# Altium PCB MainPCBV6.PcbDoc (part 3 of 5)
Units mm, origin at the board's own origin, x right, y up, seen from the top; angles counter-clockwise.
Board outline 176 x 144.01 mm, 2 copper layers (Top Layer, Bottom Layer); 232 components, 243 nets, 937 pads, 277 vias.
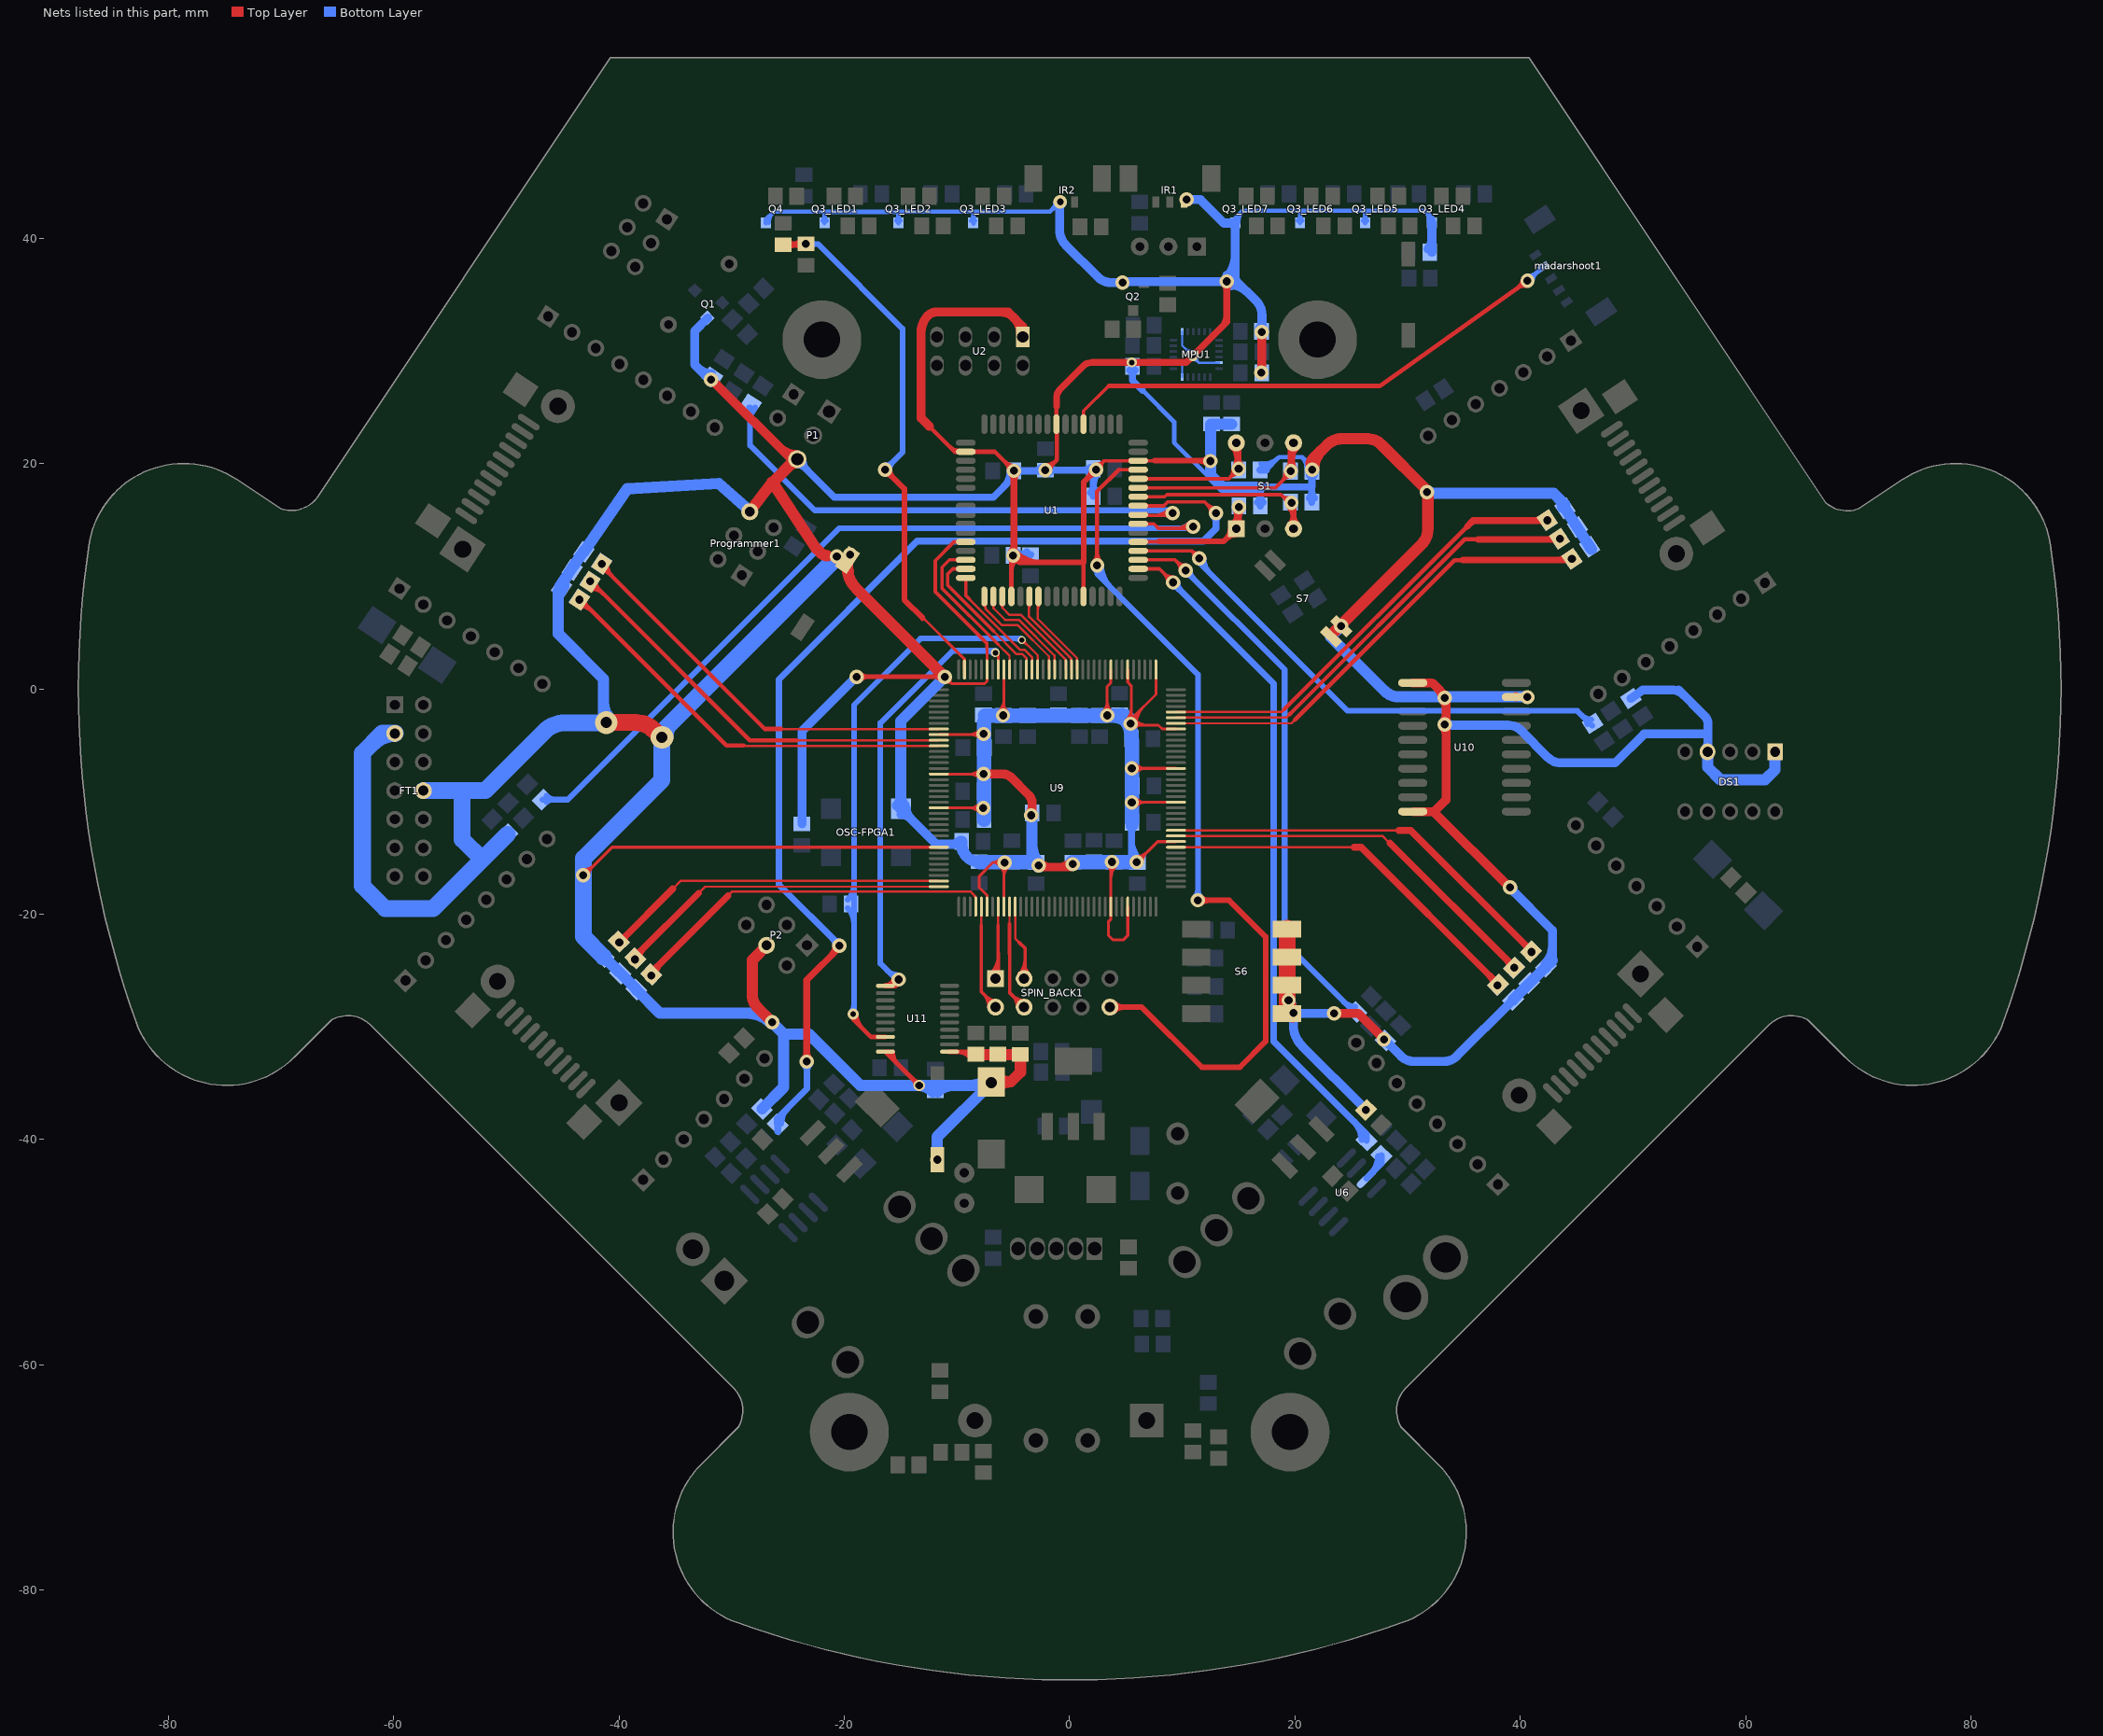
[diagram p3: the nets of this part, all layers, seen from the top]

## Via types
v1: diameter 1.27, hole 0.711, Top Layer to Bottom Layer, 228 vias
v2: diameter 1, hole 0.5, Top Layer to Bottom Layer, 16 vias
v3: diameter 2, hole 1, Top Layer to Bottom Layer, 11 vias
v4: diameter 0.8, hole 0.5, Top Layer to Bottom Layer, 5 vias
v5: diameter 1, hole 0.7, Top Layer to Bottom Layer, 5 vias
v6: diameter 1.2, hole 0.6, Top Layer to Bottom Layer, 3 vias
v7: diameter 1.778, hole 0.965, Top Layer to Bottom Layer, 2 vias
v8: diameter 1, hole 0.6, Top Layer to Bottom Layer, 2 vias
v9: diameter 0.9, hole 0.5, Top Layer to Bottom Layer, 1 vias
v10: diameter 0.7, hole 0.45, Top Layer to Bottom Layer, 1 vias
v11: diameter 1.2, hole 0.9, Top Layer to Bottom Layer, 1 vias
v12: diameter 0.8, hole 0.4, Top Layer to Bottom Layer, 1 vias
v13: diameter 1.1, hole 0.711, Top Layer to Bottom Layer, 1 vias

## Nets (pads, with @x,y where several pads share a name; then routed paths per layer and width w, separated by ;. In a path a pad name is that pad's centre, name@x,y a point inside that pad or via, vN(x,y) a via of type N, cw(c..) or ccw(c..) an arc to the next point about the centre after c; other vN are vias at no path point) (continued)
CUR_KICK_O: R5.1 U1.9 | length 107.3
  Top Layer w0.305: U1.9@6.075,16.25 8.35,16.25 8.684,16.583 11.992,16.583 v1(12.979,15.596) ; U1.9@6.762,16.163 cw(c6.971,15.954) 6.971,16.25 cw(c6.971,16.546) U1.9@6.762,16.336 ; v1@12.497,15.596 ccw(c11.332,15.596) 12.156,16.419 ccw(c12.979,17.243) v1@12.979,16.078
  Top Layer w0.6: v1@-23.579,-32.859 ccw(c-24.151,-32.287) -23.343,-32.287 ccw(c-22.534,-32.287) v1@-23.106,-32.859 ; v1(-23.343,-33.096) -23.343,-25.857 v1@-20.345,-22.86 ; -21.127,-23.641 ccw(c-21.959,-22.809) v1@-20.782,-22.809
  Bottom Layer w0.6: R5.1@-25.972,-38.595 -25.972,-38.164 -23.317,-35.509 v1@-23.317,-33.401 ; R5.1@-25.914,-39.313 R5.1@-25.914,-38.665 ; R5.1@-25.635,-38.595 cw(c-23.783,-38.595) -25.093,-37.285 ; v1@-23.579,-33.333 cw(c-24.213,-33.966) -23.317,-33.966 ; -23.317,-33.844 cw(c-22.595,-33.844) v1@-23.106,-33.333 ; -21.055,-22.151 cw(c-21.713,-22.809) v1@-20.782,-22.809 ; -20.932,-22.273 ccw(c-20.447,-21.788) v1@-20.447,-22.474 ; v1@-20.371,-22.835 -25.806,-17.399 -25.806,0.838 -13.538,13.106 11.862,13.106 12.979,14.224 v1(12.979,15.596) ; v1@12.743,15.359 cw(c12.171,14.787) 12.979,14.787 cw(c13.788,14.787) v1@13.216,15.359
  other v1: -20.447,-22.809
CUR_M1_O: R1.1 U1.8 | length 52.6
  Top Layer w0.305: U1.8@6.075,15.45 6.132,15.392 8.941,15.392 v1(9.144,15.596) ; U1.8@6.762,15.536 ccw(c7.109,15.884) 7.109,15.392 ; 7.488,15.392 ccw(c7.488,17.251) v1@8.803,15.937 ; 8.224,15.392 ccw(c8.224,16.515) v1@9.018,15.721 ; 8.469,15.392 cw(c8.469,14.921) v1@8.803,15.254
  Bottom Layer w0.508: R1.1@-28.467,24.991 R1.1@-28.372,24.895 ; -28.372,23.883 cw(c-26.85,23.883) R1.1@-27.926,24.96 ; R1.1@-28.372,24.968 -28.372,21.59 -22.631,15.85 8.89,15.85 v1@9.296,15.443 ; 7.611,15.85 cw(c7.611,14.063) v1@8.875,15.326
CUR_M2_O: R7.1 U1.7 | length 78.6
  Top Layer w0.305: U1.7@6.075,14.65 7.474,14.65 7.874,14.249 10.795,14.249 v1(10.947,14.402) ; U1.7@6.762,14.563 cw(c6.971,14.354) 6.971,14.65 cw(c6.971,14.946) U1.7@6.762,14.736 ; 9.414,14.249 ccw(c9.414,15.935) v1@10.606,14.743 ; v1@10.606,14.061 ccw(c10.15,13.605) 10.15,14.249 ccw(c10.15,15.199) v1@10.822,14.528
  Bottom Layer w0.508: R7.1@-46.801,-9.841 -44.563,-9.841 -20.472,14.249 10.744,14.249 10.897,14.402 v1(10.947,14.402) ; R7.1@-46.45,-10.05 cw(c-45.945,-10.556) R7.1@-45.945,-9.841 ; R7.1@-46.45,-9.49 ccw(c-45.603,-8.644) -45.603,-9.841 ; 9.66,14.249 ccw(c9.66,15.69) v1@10.678,14.671
CUR_M3_O: R3.1 U1.3 | length 54.9
  Top Layer w0.305: U1.3@6.075,11.45 9.353,11.45 v1@10.185,10.617 ; U1.3@6.762,11.363 cw(c6.971,11.154) 6.971,11.45 cw(c6.971,11.746) U1.3@6.762,11.536 ; v1@9.804,10.516 ccw(c8.639,10.516) 9.463,11.339 ccw(c10.287,12.163) v1@10.287,10.998
  Bottom Layer w0.508: v1@10.274,10.503 19.075,1.702 19.075,-22.527 R3.1@25.338,-28.79 ; v1@10.287,10.135 cw(c10.287,9.276) 10.894,9.883 ; v1@10.668,10.516 ccw(c11.649,10.516) 10.955,9.822 ; 24.346,-27.798 ccw(c25.369,-26.775) R3.1@25.369,-28.221
  other v1: 10.287,10.516
CUR_M4_O: R9.1 U1.4 | length 51.5
  Top Layer w0.305: U1.4@6.075,12.25 10.839,12.25 ; U1.4@6.762,12.163 cw(c6.971,11.954) 6.971,12.25 cw(c6.971,12.546) U1.4@6.762,12.336 ; v1@11.03,11.659 ccw(c10.357,11.768) 10.839,12.25 ; v1@11.429,12.059 cw(c11.321,12.731) 10.839,12.25 ; v1(11.506,11.582) 10.839,12.25
  Bottom Layer w0.508: v1@11.316,11.392 24.663,-1.956 45.06,-1.956 R9.1@46.38,-3.277 ; v1@11.887,11.582 ccw(c13.727,11.582) 12.426,10.282 ; 45.483,-2.38 ccw(c46.329,-1.534) R9.1@46.329,-2.73 ; 45.723,-2.62 cw(c45.217,-3.126) R9.1@45.933,-3.126
CUR_MAIN: R11.2 U6.7 | length 4.3
  Bottom Layer w0.6: U6.7@26.357,-43.456 27.675,-42.139 R11.2@27.675,-41.439 ; U6.7@26.753,-43.06 ccw(c25.202,-41.509) R11.2@27.395,-41.509
CUR_MAIN_O: R12.1 U1.2 | length 64.9
  Top Layer w0.305: U1.2@6.075,10.65 7.969,10.65 v1(9.169,9.449) ; U1.2@6.762,10.563 cw(c6.971,10.354) 6.971,10.65 cw(c6.971,10.946) U1.2@6.762,10.736 ; v1@8.687,9.449 ccw(c7.522,9.449) 8.346,10.273 ccw(c9.169,11.097) v1@9.169,9.931
  Bottom Layer w0.6: v1@9.119,9.449 v1(9.169,9.449) ; v1@9.169,9.114 cw(c9.169,8.428) 9.655,8.913 ; v1@9.504,9.449 ccw(c10.436,9.449) 9.777,8.79 ; 9.652,8.915 18.11,0.457 18.11,-31.293 26.354,-39.536 R12.1@26.354,-40.093 ; 25.292,-38.475 cw(c23.746,-40.022) R12.1@25.933,-40.022
CUR_MSP: SPIN_BACK1.10 U1.13 | length 89.3
  Top Layer w0.305: 4.362,19.45 U1.13@6.075,19.45 ; U1.13@5.389,19.363 ccw(c5.179,19.154) 5.179,19.45 ccw(c5.179,19.746) U1.13@5.389,19.536
  Top Layer w0.381: v1@2.124,11.262 ccw(c1.365,12.021) 2.438,12.021 ccw(c3.512,12.021) v1@2.753,11.262 ; v1(2.438,10.947) 2.438,17.526 4.362,19.45
  Top Layer w0.508: SPIN_BACK1.10@3.574,-28.261 6.391,-28.261 11.725,-33.594 15.123,-33.594 17.399,-31.318 17.399,-22.022 14.148,-18.771 v1(11.379,-18.771) ; SPIN_BACK1.10@3.925,-28.612 cw(c4.771,-29.458) 4.771,-28.261 cw(c4.771,-27.063) SPIN_BACK1.10@3.925,-27.91 ; v1@11.649,-19.04 cw(c12.299,-19.69) 12.299,-18.771 cw(c12.299,-17.851) v1@11.649,-18.501
  Bottom Layer w0.508: v1@2.217,10.637 cw(c1.911,10.208) 2.438,10.208 cw(c2.966,10.208) v1@2.66,10.637 ; v1@2.311,10.947 ccw(c3.791,10.947) 2.745,9.901 ; v1(2.438,10.947) 2.438,10.208 11.379,1.267 v1(11.379,-18.771) ; v1@2.819,10.947 ccw(c5.525,10.947) 3.612,9.034 ; v1@11.11,-18.501 ccw(c10.459,-17.851) 11.379,-17.851 ccw(c12.299,-17.851) v1@11.649,-18.501
D0: U1.46 U9.63 | length 14.4
  Top Layer w0.203: -6.366,3.953 -6.315,3.902 -6.313,3.902 -5.342,2.931 U9.63@-5.342,1.711
  Top Layer w0.305: U1.46@-9.911,11.363 ccw(c-10.121,11.154) -10.121,11.45 ccw(c-10.121,11.746) U1.46@-9.911,11.536 ; U1.46@-9.225,11.45 -10.674,11.45 -11.328,10.795 -11.328,8.915 -6.366,3.953
D1: U1.47 U9.60 | length 13.8
  Top Layer w0.2: -6.68,5.038 -4.715,3.073 -4.191,3.073 -3.842,2.725 U9.60@-3.842,1.711
  Top Layer w0.305: U1.47@-9.911,10.563 ccw(c-10.121,10.354) -10.121,10.65 ccw(c-10.121,10.946) U1.47@-9.911,10.736 ; U1.47@-9.225,10.65 -10.382,10.65 -10.82,10.211 -10.82,9.177 -6.756,5.112
D2: U1.48 U9.59 | length 11.3
  Top Layer w0.203: -8.905,7.976 -8.905,7.961 -4.419,3.475 -4.008,3.475 -3.342,2.809 U9.59@-3.342,1.711
  Top Layer w0.305: U1.48@-9.311,9.763 cw(c-9.521,9.554) -9.225,9.554 cw(c-8.929,9.554) U1.48@-9.138,9.763 ; U1.48@-9.225,9.85 -9.225,8.296 -8.905,7.976
D3: U1.49 U9.56 | length 10.1
  Top Layer w0.203: U1.49@-7.669,7.454 cw(c-7.879,7.13) -7.493,7.13 ; U1.49@-7.575,8.2 -7.493,8.118 -7.493,7.137 -5.994,5.639 -4.597,5.639 -1.842,2.884 U9.56@-1.842,1.711
D4: U1.50 U9.55 | length 10.1
  Top Layer w0.203: U1.50@-6.897,7.477 cw(c-7.193,7.181) -6.775,7.181 cw(c-6.356,7.181) U1.50@-6.652,7.477 ; U1.50@-6.775,8.2 -6.775,7.156 -5.74,6.121 -4.51,6.121 -1.342,2.954 U9.55@-1.342,1.711
D5: U1.51 U9.53 | length 10.3
  Top Layer w0.203: U1.51@-6.095,7.474 cw(c-6.362,7.194) -5.975,7.194 ; U1.51@-5.975,8.2 -5.975,7.194 ; U1.51@-5.855,7.474 ccw(c-5.587,7.194) -5.975,7.194 ; -0.455,2.691 cw(c-0.671,2.475) U9.53@-0.366,2.475 ; U9.53@-0.342,1.711 -0.342,2.578 -4.317,6.553 -5.334,6.553 -5.975,7.194
D6: U1.54 U9.52 | length 9.1
  Top Layer w0.203: U1.54@-3.697,7.477 cw(c-3.916,7.258) -3.607,7.258 ; -3.607,7.104 cw(c-3.079,7.104) U1.54@-3.452,7.477 ; U1.54@-3.575,8.2 -3.607,8.168 -3.607,6.413 0.158,2.649 U9.52@0.158,1.711 ; -0.005,2.811 cw(c-0.341,2.475) U9.52@0.134,2.475
D7: U1.55 U9.51 | length 8.5
  Top Layer w0.203: U1.55@-2.897,7.477 cw(c-3.086,7.289) -2.819,7.289 ; -2.819,7.073 cw(c-2.249,7.073) U1.55@-2.652,7.477 ; U1.55@-2.819,8.155 -2.819,6.196 0.658,2.719 U9.51@0.658,1.711
DCH_LIMIT: madarshoot1.4 U1.21 | length 50.4
  Top Layer w0.305: U1.21@1.139,24.186 ccw(c0.929,24.396) 1.225,24.396 ccw(c1.521,24.396) U1.21@1.312,24.186 ; U1.21@1.225,23.5 1.225,24.669 3.454,26.899
  Top Layer w0.4: 3.454,26.899 27.534,26.899 ; 27.537,26.894 v1(40.64,36.22) ; v1@40.211,36.293 cw(c39.175,36.467) 39.784,35.611 cw(c40.393,34.756) v1@40.568,35.791
  Bottom Layer w0.4: v1(40.64,36.22) madarshoot1.4@42.04,37.461 ; v1@40.666,36.655 ccw(c40.729,37.703) 41.426,36.917 ccw(c42.122,36.131) v1@41.074,36.194 ; 41.661,37.126 ccw(c41.439,37.376) madarshoot1.4@41.773,37.356
DIN: U9.65 U11.1 | length 44.8
  Top Layer w0.254: U9.65@-6.342,1.711 v4@-6.342,3.066
  Top Layer w0.508: U11.1@-15.714,-26.361 ccw(c-15.714,-25.698) v1@-15.065,-25.832 ; v1@-15.57,-25.811 cw(c-16.337,-25.819) U11.1@-15.795,-26.361 ; v1@-15.562,-25.73 cw(c-16.337,-25.57) -16.337,-26.361 U11.1@-15.795,-26.361 ; v1@-15.248,-26.183 ccw(c-15.346,-26.81) U11.1@-15.795,-26.361 ; v1@-15.215,-25.781 U11.1@-15.795,-26.361
  Bottom Layer w0.508: -16.186,-25.012 ccw(c-15.189,-24.015) v1@-15.189,-25.425 ; v1@-15.151,-26.048 -16.815,-24.384 -16.815,-3.048 -10.389,3.378 -6.579,3.378 -6.502,3.302 -6.502,3.2 v4(-6.604,3.2) ; v1@-15.151,-25.845 v1@-15.151,-25.692 ; -7.386,3.378 cw(c-7.386,2.419) v4@-6.707,3.097
  other v1: -15.189,-25.806
DONE: R52.1 R54.1 U9.71 | length 56.8
  Top Layer w0.254: -13.005,6.299 -9.342,2.637 U9.71@-9.342,1.711 ; -9.453,2.747 cw(c-9.725,2.475) U9.71@-9.34,2.475
  Top Layer w0.508: R52.1@-23.383,39.436 R52.1@-23.343,39.395 ; v1@-16.464,19.502 v1@-16.4,19.439 ; v1@-16.383,19.075 cw(c-16.383,18.156) -15.733,18.806 cw(c-15.082,19.456) v1@-16.002,19.456 ; v1(-16.383,19.456) -14.681,17.755 -14.681,17.719 -14.681,7.905 -13.04,6.264
  Top Layer w0.6: R54.1@-25.425,39.436 R52.1@-23.383,39.436 ; R54.1@-25.078,39.189 cw(c-24.48,38.591) -24.48,39.436 cw(c-24.48,40.281) R54.1@-25.078,39.683 ; -24.536,39.436 ccw(c-24.536,40.524) R52.1@-23.766,39.755 ; -24.399,39.436 ccw(c-24.399,40.488) R52.1@-23.656,39.744 ; -24.192,39.436 cw(c-24.192,38.834) R52.1@-23.766,39.26 ; R52.1@-24.056,39.436 cw(c-24.056,38.87) R52.1@-23.656,39.27
  Bottom Layer w0.508: v1(-23.419,39.507) -23.502,39.507 -23.538,39.472 -22.352,39.472 -22.327,39.446 -22.301,39.446 ; v1@-23.149,39.238 cw(c-22.585,38.673) -22.585,39.472 ; v1@-23.149,39.777 ccw(c-22.413,40.513) -22.413,39.472 ; -22.285,39.43 -14.834,31.979 -14.834,21.006 v1(-16.383,19.456) ; v1@-16.459,19.38 v1(-16.383,19.456) ; v1@-16.383,19.837 ccw(c-16.383,20.757) -15.733,20.107 ccw(c-15.082,19.456) v1@-16.002,19.456 ; v1@-16.256,19.355 -16.358,19.456 v1(-16.383,19.456)
GND: C1.1 C2.1 C3.1 C4.1 C5.1 C6.1 C8.1 C9.1 C10.1 C11.1 C12.1 C13.1 C40.2 C41.1 C42.1 C43.1 C44.2 C45.1 C46.1 C47.1 C48.1 C49.1 C50.1 C51.1 C52.1 C53.1 C54.1 C55.1 C56.1 C57.1 C58.1 C59.1 C60.1 C61.1 C62.1 C63.1 C64.1 C65.1 C66.1 C67.1 C68.1 C69.1 C70.1 DS1.1 DS1.4 FB1.1 FT1.3 FT1.8 IR1.3 IR2.1 MPU1.1 MPU1.11 MPU1.18 OSC-FPGA1.2 P1.3 P2.4 Programmer1.6 Q1.3 Q2.3 Q3_LED1.3 Q3_LED2.3 Q3_LED3.3 Q3_LED4.3 Q3_LED5.3 Q3_LED6.3 Q3_LED7.3 Q4.3 R18.1 R19.1 R20.1 R21.1 R22.2 R26_drivermotor1.1 R26_drivermotor2.1 R26_drivermotor3.1 R26_drivermotor4.1 R27_drivermotor1.1 R27_drivermotor2.1 R27_drivermotor3.1 R27_drivermotor4.1 R28_drivermotor1.1 R28_drivermotor2.1 R28_drivermotor3.1 R28_drivermotor4.1 R43.2 Reset1.1 Reset-FPGA.1 S6.1 S6.2 S6.3 S6.4 S7.1 S7.2 U1.14 U1.24 U1.34 U1.44 U1.52 U1.60 U2.1 U9.9 U9.16 U9.22 U9.29 U9.37 U9.42 U9.45 U9.64 U9.67 U9.81 U9.88 U9.94 U9.101 U9.114 U9.117 U9.136 U9.139 U10.1 U10.10 U10.19 U11.10 U11.11 | length 1151.9
  Top Layer w0.254: v1@-43.18,-16.307 ccw(c-43.18,-15.571) -42.66,-16.091 ; v1@-43.18,-16.053 ccw(c-43.18,-14.704) -42.226,-15.658 ; v1@-43.078,-16.51 -40.632,-14.064 U9.101@-11.617,-14.064 ; v1@-42.672,-16.561 cw(c-41.568,-16.561) -42.349,-15.78 ; U9.94@-11.617,-10.564 v1@-7.62,-10.564 ; U9.88@-11.617,-7.564 -7.702,-7.564 v1@-7.696,-7.569 ; U9.81@-11.617,-4.064 v1@-7.569,-4.064 ; v1@-11.1,1.067 -10.49,0.457 ; v1@-10.941,0.577 cw(c-10.818,0.129) -10.49,0.457 ; v1@-10.594,0.903 ccw(c-10.185,0.763) -10.49,0.457 ; -8.994,-4.064 ccw(c-8.994,-2.665) v1@-8.005,-3.654 ; -8.965,-10.564 cw(c-8.965,-11.886) v1@-8.03,-10.951 ; -8.885,-7.564 cw(c-8.885,-8.809) v1@-8.005,-7.928 ; -8.859,-7.564 ccw(c-8.859,-6.356) v1@-8.005,-7.21 ; -8.83,-10.564 ccw(c-8.83,-9.433) v1@-8.03,-10.233 ; -8.75,-4.064 cw(c-8.75,-5.117) v1@-8.005,-4.372 ; -8.381,-4.064 ccw(c-8.381,-3.278) v1@-7.825,-3.834 ; -8.352,-10.564 cw(c-8.352,-11.273) v1@-7.85,-10.771 ; U9.114@-7.342,-19.339 -7.342,-18.312 -8.052,-17.602 -8.052,-16.662 -6.807,-15.418 ; -7.342,3.607 U9.67@-7.342,1.711 -7.342,0.659 -7.544,0.457 -10.49,0.457 ; v1@-6.277,-2.003 ccw(c-7.328,-0.952) -5.842,-0.952 ; v1@-6.198,-15.723 ccw(c-6.807,-16.18) -6.807,-15.418 ; v1@-6.198,-15.113 cw(c-6.807,-14.656) -6.807,-15.418 ; v1@-6.15,-15.777 cw(c-6.894,-16.521) -5.842,-16.521 ; v1@-6.098,-2.183 ccw(c-6.715,-1.566) -5.842,-1.566 ; v1@-5.867,-15.418 -6.807,-15.418 ; v1@-5.867,-2.413 -5.842,-2.388 U9.64@-5.842,1.711 ; U9.117@-5.842,-19.339 v1@-5.842,-15.418 ; -5.842,-16.767 cw(c-4.442,-16.767) v1@-5.432,-15.777 ; -5.842,-16.154 cw(c-5.055,-16.154) v1@-5.612,-15.597 ; -5.842,-1.319 ccw(c-4.875,-1.319) v1@-5.559,-2.003 ; v1@2.921,-2.413 3.327,-2.007 3.327,0.203 3.658,0.534 U9.45@3.658,1.711 ; v1@2.968,-2.003 ccw(c2.101,-1.136) 3.327,-1.136 ccw(c4.554,-1.136) v1@3.687,-2.003 ; v1@3.4,-15.726 cw(c2.778,-16.349) 3.658,-16.349 ; 3.658,-16.838 cw(c5.23,-16.838) v1@4.118,-15.726 ; 3.658,-16.225 cw(c4.617,-16.225) v1@3.939,-15.547 ; v1@3.658,-15.341 U9.136@3.658,-19.339 3.658,-20.454 3.429,-20.683 3.429,-21.869 3.861,-22.301 4.75,-22.301 5.156,-21.895 5.156,-20.607 5.158,-20.605 U9.139@5.158,-19.339 ; v1@5.051,-2.74 ccw(c4.061,-1.75) 5.461,-1.75 ; U9.42@5.158,1.711 5.158,0.583 5.461,0.279 5.461,-3.226 7.874,-3.226 8.212,-3.564 U9.29@9.433,-3.564 ; v1@5.207,-3.175 5.639,-3.175 5.664,-3.15 5.664,-2.489 7.658,-0.496 U9.37@7.658,1.711 ; v1@5.231,-2.919 ccw(c4.674,-2.363) 5.461,-2.363 ; v1(5.41,-3.099) cw(c6.269,-3.099) 5.662,-2.492 ; v1@5.41,-2.591 ccw(c5.41,-2.223) 5.67,-2.483 ; v1@5.461,-10.058 5.466,-10.064 U9.16@9.433,-10.064 ; 5.461,-1.995 ccw(c6.514,-1.995) 5.769,-2.74 ccw(c6.943,-1.566) 6.943,-3.226 ; v1@5.486,-7.064 U9.22@9.433,-7.064 ; v1@5.59,-2.919 ccw(c6.33,-2.179) 6.33,-3.226 ccw(c6.33,-4.019) v1@5.769,-3.458 ; v1@5.664,-3.099 cw(c7.136,-3.099) 6.095,-2.058 ; v1@5.691,-10.263 cw(c6.173,-10.745) 6.173,-10.064 ; v1@5.871,-10.443 cw(c6.787,-11.359) 6.787,-10.064 ; v1@5.871,-9.725 ccw(c6.69,-8.906) 6.69,-10.064 ; v1@5.871,-7.42 cw(c6.732,-8.281) 6.732,-7.064 ; v1@5.871,-6.702 ccw(c6.745,-5.828) 6.745,-7.064 ; v1@5.918,-3.099 cw(c8.003,-3.099) 6.529,-1.625 ; v1@5.944,-15.138 ccw(c5.944,-14.464) 6.421,-14.941 ; v1@5.944,-14.884 ccw(c5.944,-13.597) 6.854,-14.507 ; v1@5.969,-15.392 7.798,-13.564 U9.9@9.433,-13.564 ; v1@6.452,-15.392 cw(c7.617,-15.392) 6.793,-14.569
  Top Layer w0.305: U1.44@-9.911,12.963 ccw(c-10.121,12.754) -10.121,13.05 ccw(c-10.121,13.346) U1.44@-9.911,13.136 ; U1.44@-9.225,13.05 -10.268,13.05 -11.938,11.379 -11.938,8.611 -7.342,4.015 -7.342,3.607 ; v1@2.337,19.533 3.051,20.247 6.073,20.247 U1.14@6.075,20.25 7.544,20.25 ; v1@2.337,19.939 ccw(c2.337,20.92) 3.031,20.226 ; v1@2.814,19.528 cw(c3.646,19.652) 3.051,20.247 ; 5.173,20.247 ccw(c5.173,20.552) U1.14@5.389,20.336 ; 5.185,20.247 cw(c5.185,19.96) U1.14@5.389,20.163 ; U1.14@6.762,20.163 cw(c6.971,19.954) 6.971,20.25 cw(c6.971,20.546) U1.14@6.762,20.336
  Top Layer w0.381: -12.471,23.317 -10.204,21.05 U1.34@-9.225,21.05 -6.638,21.05 v1(-4.943,19.355) ; -10.616,21.462 ccw(c-9.825,22.253) U1.34@-9.825,21.134 ; v1@-5.387,19.355 ccw(c-6.46,19.355) -5.702,20.114 ccw(c-4.943,20.872) v1@-4.943,19.799 ; v1@-5.333,11.522 cw(c-5.716,11.139) -5.175,11.139 ; U1.52@-5.175,8.2 -5.175,11.684 v1@-4.928,11.684 ; -5.175,10.387 cw(c-3.57,10.387) v1@-4.705,11.522 ; v1@-2.159,19.865 ccw(c-2.159,21.245) -1.183,20.269 ; v1@-2.095,19.357 -1.134,20.319 -1.134,23.458 U1.24@-1.175,23.5 -1.175,25.063 -1.168,25.07 ; v1@-1.714,19.421 cw(c-0.948,19.421) -1.49,19.963 ; U1.24@-1.235,22.84 cw(c-1.479,22.596) -1.134,22.596
  Top Layer w0.4: v1(-18.923,1.067) v1@-11.1,1.067 ; v1@-18.615,0.759 cw(c-17.873,0.017) -17.873,1.067 cw(c-17.873,2.117) v1@-18.615,1.374 ; U11.10@-16.363,-32.211 v5(-13.36,-35.214) v5@-13.36,-35.331 ; U11.10@-16.113,-32.211 ccw(c-15.509,-32.211) -15.936,-32.638 ; U11.10@-15.713,-32.211 ccw(c-14.144,-32.211) -15.253,-33.321 ; v5@-13.66,-35.214 ccw(c-14.385,-35.214) -13.873,-34.701 ccw(c-13.36,-34.189) v5@-13.36,-34.914 ; v1@-11.382,0.759 ccw(c-12.125,0.017) -12.125,1.067 ccw(c-12.125,2.117) v1@-11.382,1.374 ; U11.11@-10.744,-32.233 -8.433,-32.233 -8.382,-32.283 C68.1@-8.382,-32.563 ; U11.11@-10.033,-32.233 cw(c-10.033,-34.048) C68.1@-8.749,-32.764 ; C68.1@-9.067,-32.233 cw(c-9.067,-33.082) C68.1@-8.467,-32.481 ; U1.60@1.225,8.2 1.225,11.227
  Top Layer w0.5: v1@-5.1,11.755 ccw(c-3.825,13.03) -3.825,11.227 ; v1@-5.017,11.451 cw(c-5.013,10.685) -4.47,11.227 ; v1@-4.928,11.684 -4.47,11.227 ; v1@-4.747,12.109 ccw(c-2.618,14.238) -2.618,11.227 ; v1@-4.64,11.768 ccw(c-4.037,11.66) -4.47,11.227 ; 1.143,11.227 -4.47,11.227 ; 1.225,11.227 1.225,18.345 v1(2.337,19.456) ; v1@1.952,19.456 cw(c1.022,19.456) 1.68,18.799 cw(c2.337,18.142) v1@2.337,19.071 ; 7.544,20.25 12.325,20.25 v1@12.421,20.345 ; 11.492,20.25 cw(c11.492,19.214) v1@12.225,19.946 ; 11.643,20.25 ccw(c11.643,21.073) v1@12.225,20.491
  Top Layer w0.6: -1.168,25.07 -1.168,25.786 cw(c0.046,25.786) -0.813,26.645 1.194,28.651 ; 1.194,28.652 cw(c1.991,27.854) 1.991,28.981 v9(5.512,28.981) 10.363,28.981 13.945,32.563 13.945,33.172 ; 10.545,29.163 ccw(c10.117,29.591) v2@10.722,29.591 ; v2@10.922,29.791 ccw(c10.922,30.396) 11.35,29.968 ; 13.514,32.132 ccw(c12.473,33.172) 13.945,33.172 ; v1@13.708,35.933 cw(c13.136,35.361) 13.945,35.361 cw(c14.753,35.361) v1@14.181,35.933 ; v1(13.945,36.17) 13.945,33.172
  Top Layer w0.635: v1@-5.244,12.061 ccw(c-5.969,12.787) -4.943,12.787 ; v1@-5.167,19.13 cw(c-5.709,18.588) -4.943,18.588 cw(c-4.176,18.588) v1@-4.718,19.13 ; v1@-4.943,12.04 v1(-4.943,19.355)
  Top Layer w0.75: v1(-2.743,-15.672) -2.575,-15.84 v1@0.035,-15.84 ; v1@-2.559,-15.488 ccw(c-1.708,-14.637) -1.708,-15.84 ; -1.001,-15.84 ccw(c-1.001,-14.29) v1@0.096,-15.386
  Top Layer w0.8: v1@-31.852,27.222 cw(c-31.852,26.471) -31.32,27.002 ; v1@-31.725,27.407 P1.3@-24.562,20.244 ; -25.758,21.44 ccw(c-24.179,23.018) P1.3@-24.179,20.786 ; -12.574,33.146 ccw(c-11.103,31.676) -13.183,31.676 -13.183,24.028 -12.471,23.317 ; -12.574,33.146 cw(c-11.836,32.409) -11.836,33.452 -6.096,33.452 ; v1(-7.645,-7.569) -5.918,-7.569 cw(c-5.918,-8.612) -5.181,-7.875 -3.632,-9.423 cw(c-4.343,-10.135) -3.338,-10.135 v1@-3.338,-11.227 ; -4.941,32.932 cw(c-6.332,31.542) U2.1@-4.366,31.542 ; -4.89,32.88 -5.012,33.003 ccw(c-6.096,31.919) -6.096,33.452 ; U2.1@-4.166,31.242 -4.166,32.156 -5.461,33.452 -6.096,33.452 ; v1@-3.595,-11.061 ccw(c-4.217,-10.439) -3.338,-10.439 ; v1(17.018,28.067) 17.043,28.092 v1(17.043,31.674) ; v1(23.47,-28.804) 25.603,-28.804 v1@27.915,-31.115 ; 27.452,-30.653 cw(c26.964,-31.14) v1@27.654,-31.14 ; U10.1@30.452,0.533 32.182,0.533 33.401,-0.686 33.401,-9.855 32.334,-10.922 ; U10.10@30.505,-10.922 32.334,-10.922 ; 32.737,-0.021 cw(c31.945,-0.813) v1@33.064,-0.813 ; v1@33.133,-3.341 cw(c32.487,-3.988) 33.401,-3.988 ; v1@33.133,-3.009 ccw(c32.487,-2.362) 33.401,-2.362 ; v1@33.133,-0.979 cw(c32.487,-1.625) 33.401,-1.625 ; 38.603,-17.191 ccw(c39.091,-16.703) v1@39.091,-17.393 ; v1@39.065,-17.653 32.334,-10.922 ; U10.19@39.599,-0.686 U10.19@39.624,-0.711
  Top Layer w1: v1@-31.75,27.407 v1@-31.725,27.407 ; Programmer1.6@-28.401,15.721 -26.411,18.348 -26.356,18.348 -24.562,20.142 P1.3@-24.562,20.244 ; -27.702,-28.305 cw(c-26.574,-27.178) -28.169,-27.178 -28.169,-24.079 P2.4@-26.822,-22.733 ; -27.702,-28.305 v1(-26.416,-29.591) ; -26.365,18.313 -22.53,12.495 -22.116,12.081 ccw(c-21.491,12.706) -21.839,11.893 ccw(c-21.491,12.706) -21.491,11.822 ; -24.929,19.775 cw(c-24.179,19.026) P1.3@-24.179,20.086 ; v1@-20.707,11.603 cw(c-21.003,10.355) -19.72,10.355 ; Reset1.1@-20.047,10.951 cw(c-20.494,10.178) -19.632,10.409 ; Reset1.1@-19.72,11.011 cw(c-18.581,11.011) Reset1.1@-19.386,11.817 ; Reset1.1@-19.72,11.454 -19.72,10.739 ccw(c-17.18,10.739) -18.976,8.943 v1@-11.1,1.067 ; C68.1@-8.331,-32.436 -8.296,-32.471 C67.1@-4.394,-32.471 ; FB1.1@-6.606,-35.329 cw(c-5.569,-36.366) -5.569,-34.9 ; FB1.1@-6.606,-34.622 ccw(c-5.935,-33.952) FB1.1@-5.935,-34.9 ; FB1.1@-6.465,-35.395 cw(c-5.27,-36.59) -5.27,-34.9 cw(c-5.27,-33.21) FB1.1@-6.465,-34.405 ; FB1.1@-6.045,-34.9 -5.233,-34.9 -4.369,-34.036 C67.1@-4.369,-32.487 ; v1@21.61,19.551 cw(c22.053,19.984) 21.615,20.422 ; v1@21.615,19.456 21.615,20.422 ; v1@21.649,19.456 cw(c24.06,19.456) 22.355,21.161 ; 23.464,5.049 31.244,12.829 ccw(c29.9,14.173) 31.801,14.173 31.801,17.551 27.638,21.715 ; 27.637,21.715 ccw(c26.467,20.544) 26.467,22.2 24.155,22.2 ccw(c24.155,20.36) 22.855,21.661 21.615,20.422
  Top Layer w1.5: v3(-41.148,-2.997) -38.532,-2.997 cw(c-38.532,-5.327) v3@-36.884,-3.68 ; -37.014,-3.605 cw(c-37.634,-4.678) v3@-36.436,-4.357 ; v1@19.292,-27.677 ccw(c20.964,-27.677) S6.1@19.781,-28.86 ; S6.2@19.292,-26.34 19.292,-27.915 ccw(c20.452,-27.915) S6.1@19.798,-28.873 ; S6.2@19.292,-26.269 S6.4@19.292,-21.269
  Bottom Layer w0.2: MPU1.18@9.982,27.686 9.982,28.651 v2@10.871,29.54 ; MPU1.1@9.985,31.718 9.985,30.477 v2@10.897,29.566 ; 10.152,30.31 ccw(c10.922,31.079) v2@10.922,29.991 ; 10.275,30.187 cw(c9.679,29.591) 10.522,29.591 cw(c9.556,29.591) 10.239,28.908 cw(c10.922,28.225) v2@10.922,29.191 ; 10.494,29.968 ccw(c10.922,30.396) v2@10.922,29.791
  Bottom Layer w0.203: v2@10.871,29.54 11.469,28.943 ; v2@10.922,29.193 cw(c10.922,28.476) 11.429,28.983 ; v2@11.31,29.5 ccw(c11.89,29.364) 11.469,28.943 ; MPU1.11@13.26,28.943 11.469,28.943
  Bottom Layer w0.4: Q4.3@-26.98,41.359 -26.98,41.651 -26.264,42.367 -21.742,42.367 -21.717,42.342 ; Q4.3@-26.73,41.384 cw(c-25.484,41.384) -26.365,42.266 ; Q3_LED1.3@-21.942,41.561 ccw(c-22.369,41.988) -21.765,41.988 ccw(c-21.162,41.988) Q3_LED1.3@-21.588,41.561 ; Q3_LED1.3@-21.765,41.359 -21.765,42.314 -21.793,42.342 -21.717,42.342 ; Q3_LED2.3@-15.389,41.561 ccw(c-15.816,41.988) -15.212,41.988 ccw(c-14.608,41.988) Q3_LED2.3@-15.035,41.561 ; -15.215,42.316 -15.212,42.314 Q3_LED2.3@-15.212,41.359 ; Q3_LED3.3@-8.762,41.561 ccw(c-9.312,42.111) -8.534,42.111 ; Q3_LED3.3@-8.534,41.3 -8.534,42.316 ; -8.534,41.865 ccw(c-8.105,41.865) Q3_LED3.3@-8.409,41.561 ; -1.608,42.512 cw(c-0.838,41.742) v6@-0.838,42.831 ; -1.485,42.635 ccw(c-2.081,43.231) v6@-1.238,43.231 ; v6@-0.889,43.231 -1.753,42.367 -15.113,42.367 -15.138,42.342 -21.717,42.342 ; 6.474,26.496 9.271,23.698 9.271,21.869 12.268,18.872 ; Q3_LED7.3@14.701,41.359 14.701,41.778 15.367,42.443 ; Q3_LED7.3@14.951,41.392 cw(c16.373,41.438) 15.367,42.443 ; R21.1@16.906,19.581 ccw(c17.032,20.931) 17.991,19.972 ; R21.1@16.943,19.979 ccw(c17.135,22.032) 18.593,20.574 ; R21.1@17.45,19.431 18.593,20.574 ; Q3_LED6.3@20.273,41.561 ccw(c19.846,41.988) 20.45,41.988 ccw(c21.053,41.988) Q3_LED6.3@20.626,41.561 ; 20.447,42.393 20.45,42.39 Q3_LED6.3@20.45,41.359 ; 20.857,20.395 ccw(c22.168,20.664) R19.1@21.53,19.487 ; R19.1@21.049,19.456 ccw(c19.594,19.543) 20.625,20.574 ; R19.1@21.079,19.461 ccw(c19.529,19.478) 20.625,20.574 ; R19.1@21.161,20.037 ccw(c21.514,20.39) R19.1@21.514,19.891 ; R19.1@21.193,20.006 ccw(c21.499,20.312) R19.1@21.499,19.879 ; R19.1@21.499,19.329 21.499,19.7 20.625,20.574 ; Q3_LED5.3@26.051,41.561 ccw(c25.624,41.988) 26.228,41.988 ccw(c26.832,41.988) Q3_LED5.3@26.405,41.561 ; Q3_LED5.3@26.228,41.359 26.228,42.433 26.238,42.443 ; Q3_LED4.3@31.903,41.414 ccw(c30.666,41.562) 31.547,42.443 ; 32.129,41.861 cw(c31.705,41.438) Q3_LED4.3@32.3,41.366 ; Q3_LED4.3@32.182,41.351 32.182,41.808 31.547,42.443 ; 15.367,42.443 26.238,42.443 ; 18.593,20.574 20.625,20.574 ; 26.238,42.443 31.547,42.443
  Bottom Layer w0.6: C1.1@-31.961,27.313 -31.864,27.216 C1.1@-31.864,27.064 ; C41.1@5.322,28.287 cw(c4.725,27.69) 5.57,27.69 cw(c6.415,27.69) C41.1@5.817,28.287 ; C41.1@5.406,28.875 cw(c5.01,28.479) C41.1@5.57,28.479 ; C41.1@5.57,28.635 5.57,27.386 6.46,26.496 6.474,26.496 ; v1@12.421,20.345 v1@12.421,20.549
  Bottom Layer w0.635: P1.3@-24.179,19.903 cw(c-24.179,18.962) -23.514,19.628 ; P1.3@-24.003,20.599 -24.003,20.117 -20.904,17.018 -6.782,17.018 -4.943,18.857 v1(-4.943,19.355) -2.225,19.355 v1(-2.159,19.421) 1.986,19.421 C12.1@2.098,19.533 ; P1.3@-23.697,20.386 ccw(c-22.308,20.386) -23.29,19.404 ; -5.837,17.963 ccw(c-7.229,19.355) C10.1@-5.26,19.355 ; -5.792,18.008 ccw(c-7.038,19.255) C10.1@-5.275,19.255 ; v1(-5.019,11.836) -5.146,11.836 -5.06,11.923 C9.1@-3.48,11.923 ; C13.1@-4.794,11.612 cw(c-4.044,10.861) C9.1@-4.044,11.923 ; C13.1@-4.784,11.701 cw(c-4.249,11.167) -4.249,11.923 ; C13.1@-4.784,12.172 ccw(c-4.183,12.772) C9.1@-4.183,11.923 ; C13.1@-4.744,12.123 ccw(c-4.39,12.365) -4.279,11.951 ; C10.1@-4.718,19.13 cw(c-4.176,18.588) -4.176,19.355 cw(c-4.176,20.121) C10.1@-4.718,19.579 ; C10.1@-4.708,19.12 cw(c-4.14,18.552) -4.14,19.355 cw(c-4.14,20.158) C10.1@-4.708,19.59 ; C9.1@-3.815,11.688 ccw(c-4.383,11.12) -4.383,11.923 ccw(c-4.383,12.726) C9.1@-3.815,12.158 ; -3.221,19.355 ccw(c-3.221,20.383) C11.1@-2.494,19.656 ; -3.085,19.355 ccw(c-3.085,20.347) C11.1@-2.384,19.645 ; C11.1@-1.934,19.196 cw(c-1.392,18.654) -1.392,19.421 cw(c-1.392,20.187) C11.1@-1.934,19.645 ; C11.1@-1.824,19.186 cw(c-1.256,18.618) -1.256,19.421 cw(c-1.256,20.224) C11.1@-1.824,19.656 ; 1.267,19.421 ccw(c1.267,20.264) C12.1@1.863,19.668 ; 1.324,19.421 cw(c1.324,18.658) 1.863,19.197 cw(c1.295,18.63) 2.098,18.63 cw(c2.901,18.63) C12.1@2.333,19.197 ; C12.1@1.484,19.421 ccw(c1.484,20.309) C12.1@2.112,19.681 ; C12.1@1.656,19.421 cw(c1.656,18.776) C12.1@2.112,19.232 ; C8.1@1.863,17.429 ccw(c1.295,17.997) 2.098,17.997 ccw(c2.901,17.997) C8.1@2.333,17.429 ; C8.1@2.098,17.094 C12.1@2.098,19.456 ; 2.098,18.113 cw(c3.68,18.113) C12.1@2.561,19.232 ; C58.1@5.292,-12.197 cw(c4.847,-12.642) 5.476,-12.642 ; C50.1@5.476,-14.889 C58.1@5.476,-12.497 ; 5.476,-13.595 ccw(c7.707,-13.595) C50.1@6.13,-15.172 ; 5.476,-13.497 ccw(c7.839,-13.497) C50.1@6.168,-15.168 ; 5.476,-12.887 cw(c6.452,-12.887) C58.1@5.762,-12.197 ; 5.63,-14.308 cw(c4.767,-14.806) C50.1@5.659,-15.251 ; R18.1@16.691,16.566 ccw(c16.124,17.133) 16.927,17.133 ccw(c17.729,17.133) R18.1@17.162,16.566 ; R21.1@16.901,19.431 R21.1@17.45,19.431 ; R18.1@16.927,16.231 16.927,17.907 16.927,17.932 21.448,17.932 ; R20.1@21.263,16.921 ccw(c20.721,17.464) 21.488,17.464 ; R19.1@21.263,18.994 cw(c20.696,18.427) 21.499,18.427 cw(c22.301,18.427) R19.1@21.734,18.994 ; R19.1@21.289,19.232 cw(c20.784,18.727) R19.1@21.499,18.727 ; R20.1@21.488,16.561 21.488,17.973 21.499,17.983 R19.1@21.499,19.329 ; 21.488,17.514 ccw(c22.326,17.514) R20.1@21.734,16.921 ; R19.1@21.499,18.653 cw(c22.317,18.653) R19.1@21.738,19.232
  Bottom Layer w0.8: -33.005,28.487 ccw(c-31.801,29.69) C1.1@-31.801,27.988 ; -32.464,27.946 ccw(c-31.852,28.558) C1.1@-31.852,27.692 ; Q1.3@-32.131,32.912 -32.131,32.918 -33.299,31.75 -33.299,28.782 C1.1@-31.896,27.378 ; C44.2@-23.774,-12.004 -23.774,-3.785 v1(-18.923,1.067) ; OSC-FPGA1.2@-14.985,-11.151 cw(c-14.985,-12.358) -14.131,-11.504 cw(c-13.278,-10.651) OSC-FPGA1.2@-14.485,-10.651 ; OSC-FPGA1.2@-14.985,-10.651 -11.838,-13.797 C65.1@-9.586,-13.797 ; -10.573,-13.797 ccw(c-10.573,-12.651) C65.1@-9.763,-13.461 ; -0.889,42.625 cw(c-0.233,42.625) v6@-0.697,43.089 ; v6@-0.889,43.231 -0.889,40.709 ccw(c0.932,40.709) -0.356,39.421 2.539,36.526 ; 2.54,36.526 ccw(c3.632,37.619) 3.632,36.073 v1(4.689,36.073) ; v1@4.851,36.144 4.857,36.15 14.701,36.15 Q3_LED7.3@14.701,41.359 ; v1@4.855,35.907 cw(c5.44,35.322) 5.44,36.15 ; v1(10.389,43.434) 11.608,43.434 13.691,41.351 Q3_LED7.3@14.681,41.351 ; v1@13.778,36.336 ccw(c11.551,38.564) 14.701,38.564 ; v1@13.945,35.935 cw(c13.945,33.221) 15.863,35.14 ; v1@13.945,36.735 cw(c13.945,35.952) 14.498,36.505 ; v1@14.344,35.77 ccw(c13.482,36.632) 14.701,36.632 ; 14.854,36.15 16.548,34.455 cw(c15.291,33.198) 17.069,33.198 R43.2@17.069,31.699 ; R43.2@16.859,32.001 ccw(c16.354,32.507) 17.069,32.507 ; v1(23.47,-28.804) 19.924,-28.804 cw(c19.924,-28.717) v1(19.863,-28.778) 19.863,-29.885 ccw(c22.403,-29.885) 20.607,-31.681 v1(26.303,-37.377) ; C2.1@27.889,-31.375 cw(c27.889,-32.072) C2.1@28.382,-31.579 ; C2.1@28.03,-31.228 29.416,-32.614 ; 29.417,-32.614 ccw(c30.52,-31.51) 30.52,-33.071 33.274,-33.071 ; R22.2@31.787,39.037 ccw(c30.906,39.917) 32.151,39.917 ; R22.2@32.151,38.77 Q3_LED4.3@32.151,41.359 ; v1@33.274,-3.226 38.938,-3.226 cw(c38.938,-4.82) 40.065,-3.692 ; v1@33.466,-3.009 ccw(c33.989,-2.485) 33.989,-3.226 ; 34.358,-32.622 cw(c33.274,-31.538) 33.274,-33.071 ; v1@39.052,-17.64 42.85,-21.438 42.85,-24.11 ; R26_drivermotor3.1@39.319,-27.661 34.358,-32.622 cw(c33.274,-31.538) 33.274,-33.071 ; v1@39.326,-17.628 ccw(c40.016,-17.628) 39.528,-18.115 ; 40.066,-3.693 42.484,-6.112 ; R28_drivermotor3.1@42.184,-24.423 ccw(c40.576,-22.815) 42.85,-22.815 ; 42.485,-6.112 ccw(c43.612,-4.984) 43.612,-6.579 48.412,-6.579 50.993,-3.998 56.479,-3.998 56.667,-3.81 ; C5.1@49.816,-0.861 50.876,-0.102 53.442,-0.102 cw(c53.442,-1.573) 54.482,-0.533 ; 54.051,-0.102 56.375,-2.426 cw(c55.67,-3.131) 56.667,-3.131 56.667,-3.81 ; DS1.4@56.411,-5.343 ccw(c55.792,-4.724) 56.667,-4.724 ; DS1.4@56.667,-5.613 56.667,-3.81
  Bottom Layer w1: -45.415,7.945 cw(c-44.212,7.945) R28_drivermotor1.1@-45.063,8.796 ; R28_drivermotor1.1@-45.263,9.087 R27_drivermotor1.1@-44.233,10.6 ; R28_drivermotor1.1@-45.113,8.985 -45.415,8.683 -45.415,4.902 -41.377,0.864 v3@-41.377,-3.023 ; R28_drivermotor1.1@-44.911,9.096 cw(c-43.95,9.279) -44.758,9.829 ; R27_drivermotor1.1@-44.335,10.473 -43.169,12.185 R26_drivermotor1.1@-43.078,12.319 ; R26_drivermotor1.1@-43.132,12.16 -39.268,17.755 -31.162,18.235 Programmer1.6@-28.448,15.824 ; -41.377,-1.238 ccw(c-39.389,-1.238) v3@-40.794,-2.644 ; R26_drivermotor2.1@-41.36,-23.779 -38.43,-26.708 R28_drivermotor2.1@-38.43,-26.744 ; R28_drivermotor2.1@-38.48,-26.694 R28_drivermotor2.1@-38.43,-26.744 ; -28.643,-28.804 cw(c-28.643,-31.818) v1@-26.511,-29.686 ; C3.1@-27.319,-37.301 -25.4,-35.382 -25.4,-30.658 -23.139,-30.658 -18.596,-35.202 -7.668,-35.202 v3@-6.985,-34.519 ; v1(-26.416,-29.591) v1@-26.264,-29.591 ; -25.4,-30.632 -27.229,-28.804 -36.37,-28.804 R28_drivermotor2.1@-38.43,-26.744 ; OSC-FPGA1.2@-15.268,-10.368 ccw(c-15.95,-9.685) -14.985,-9.685 ccw(c-14.019,-9.685) OSC-FPGA1.2@-14.702,-10.368 ; OSC-FPGA1.2@-14.985,-10.651 -14.985,-2.844 v1(-11.074,1.067) ; v5@-13.535,-35.202 cw(c-13.535,-37.169) C70.1@-12.144,-35.778 ; v1(-11.76,-41.802) -11.76,-39.776 v3(-6.96,-34.976) ; C70.1@-11.732,-35.778 cw(c-10.341,-37.169) -10.341,-35.202 ; C65.1@-9.586,-13.538 -9.586,-13.797 ccw(c-8.026,-13.797) C55.1@-8.026,-15.357 ; -8.712,-35.202 ccw(c-8.712,-33.224) v3@-7.313,-34.622 ; v3@-7.46,-34.976 cw(c-8.667,-34.976) -7.813,-35.829 cw(c-6.96,-36.683) v3@-6.96,-35.476 ; C59.1@-3.338,-15.382 C48.1@-3.338,-11.024 ; -3.338,-14.465 ccw(c-2.155,-14.465) C59.1@-2.991,-15.302 ; -3.338,-13.911 ccw(c-0.982,-13.911) C59.1@-2.648,-15.576 ; C43.1@12.497,23.51 12.497,18.974 13.564,17.907 16.927,17.907 ; C43.1@12.598,23.51 C40.2@14.387,23.51 ; v1@19.924,-28.804 cw(c20.747,-27.981) v1@19.583,-27.981 ; v1@19.94,-28.668 cw(c20.422,-27.981) v1@19.583,-27.981 ; v1@19.947,-28.673 cw(c20.555,-27.915) 19.583,-27.915 v1@19.583,-27.981 ; v1@24.13,5.588 23.152,4.61 27.953,-0.191 ; 27.954,-0.191 ccw(c29.21,1.067) 29.21,-0.711 v1@40.564,-0.711 ; v1@31.82,17.571 ccw(c32.357,18.108) 32.357,17.348 ; v1@31.979,17.348 42.977,17.348 R28_drivermotor4.1@43.942,16.383 ; R26_drivermotor3.1@39.35,-27.61 R28_drivermotor3.1@42.29,-24.671 42.85,-24.11 ; 43.443,16.882 cw(c42.664,16.104) R28_drivermotor4.1@43.765,16.104 ; R28_drivermotor4.1@43.97,16.021 45.042,14.357 46.167,12.608 R26_drivermotor4.1@46.304,12.395 ; DS1.4@56.623,-5.613 56.623,-6.941 57.76,-8.077 61.722,-8.077 62.611,-7.188 DS1.1@62.611,-5.715
  Bottom Layer w1.27: C55.1@-8.026,-15.382 C59.1@-3.338,-15.382 ; C53.1@-7.61,-11.608 C54.1@-7.61,-9.093 C61.1@-7.61,-2.967 ; C61.1@-7.511,-2.377 C46.1@0.925,-2.377 ; C59.1@-3.442,-15.382 cw(c-3.442,-16.371) v1(-2.743,-15.672) ; C49.1@0.279,-15.382 C50.1@5.969,-15.382 ; C46.1@0.79,-2.322 cw(c0.79,-2.425) 0.864,-2.352 ccw(c0.925,-2.291) C46.1@0.925,-2.377 ; v1@3.669,-2.377 cw(c3.669,-4.84) v1(5.41,-3.099) ccw(c4.608,-3.185) C51.1@4.608,-2.377 ; C51.1@4.648,-2.337 C51.1@4.608,-2.377 ; C51.1@4.758,-2.507 cw(c2.962,-4.303) 5.502,-4.303 C57.1@5.502,-4.445 ; C58.1@5.527,-11.811 C57.1@5.527,-4.597 ; C46.1@0.925,-2.377 C51.1@4.608,-2.377
  Bottom Layer w1.5: -61.826,-4.753 cw(c-59.919,-6.661) FT1.3@-59.919,-3.962 ; FT1.3@-59.868,-3.937 -61.011,-3.937 -62.789,-5.715 -62.789,-17.475 -60.757,-19.507 -56.518,-19.507 C4.1@-49.925,-12.915 ; FT1.8@-57.379,-9.017 -51.867,-9.017 -46.616,-3.767 cw(c-44.82,-5.563) -44.82,-3.023 v3@-41.377,-3.023 ; -53.95,-9.779 -53.95,-13.36 -52.172,-15.138 ; R26_drivermotor2.1@-41.377,-23.8 -43.18,-21.996 -43.18,-15.062 -36.22,-8.103 -36.22,-4.293 v3(-36.195,-4.293) -36.144,-4.242 -36.144,-3.775 -21.146,11.223 ; v3@-35.945,-4.293 cw(c-34.214,-4.293) -35.438,-3.068
  other v1: 27.889,-31.14 19.431,-27.661 39.091,-17.628 -43.18,-16.561 0.279,-15.57 -5.791,-15.418 5.944,-15.392 3.759,-15.367 -3.429,-11.227 -7.671,-10.592 5.512,-10.084 5.512,-7.061 -7.645,-4.013 33.299,-3.175 -5.918,-2.362 3.327,-2.362 33.299,-0.813 40.615,-0.737 24.079,5.588 -20.676,11.735 -19.482,11.913 31.725,17.475 21.514,19.456 12.497,20.218 -31.852,27.457
  other v2: 10.922,29.591
  other v6: -0.838,43.231
HALL1_drivermotor1: R24_drivermotor1.1 R27_drivermotor1.2 U9.82 | length 41.4
  Top Layer w0.203: -24.232,-4.564 U9.82@-11.617,-4.564
  Top Layer w0.381: R24_drivermotor1.1@-42.868,9.439 ccw(c-41.951,9.782) -42.204,8.836 ; R24_drivermotor1.1@-42.628,8.949 cw(c-42.628,7.238) -41.417,8.448 ; R24_drivermotor1.1@-42.57,9.106 cw(c-42.57,7.91) -41.725,8.756 ; v1(-42.57,9.55) -42.57,9.468 -42.674,9.365 -42.334,9.365 -28.405,-4.564 -24.232,-4.564 ; R24_drivermotor1.1@-42.168,9.409 ccw(c-41.661,9.409) -42.019,9.05 ; R24_drivermotor1.1@-42.126,9.55 ccw(c-41.175,9.55) -41.848,8.878
HALL1_drivermotor2: R24_drivermotor2.1 R27_drivermotor2.2 U9.108 | length 32.8
  Top Layer w0.203: -32.944,-18.136 -32.372,-17.564 U9.108@-11.617,-17.564
  Top Layer w0.6: R24_drivermotor2.1@-38.866,-23.97 cw(c-38.149,-24.133) R24_drivermotor2.1@-38.339,-23.422 ; R24_drivermotor2.1@-38.659,-23.851 -32.944,-18.136 ; R24_drivermotor2.1@-38.627,-23.499 ccw(c-38.627,-22.727) -38.081,-23.273 ; R24_drivermotor2.1@-38.277,-23.849 cw(c-37.359,-23.849) -38.008,-23.2 ; R24_drivermotor2.1@-38.273,-24.028 cw(c-36.912,-24.028) -37.874,-23.066
  other v1: -38.608,-24.028
HALL1_drivermotor3: R24_drivermotor3.1 R27_drivermotor3.2 U9.10 | length 37.3
  Top Layer w0.203: U9.10@9.433,-13.064 27.745,-13.064 28.372,-13.691
  Top Layer w0.6: 28.423,-13.691 R24_drivermotor3.1@39.37,-24.638 ; 38.81,-24.078 cw(c38.126,-24.761) R24_drivermotor3.1@39.093,-24.761 ; 38.838,-24.106 cw(c38.18,-24.765) R24_drivermotor3.1@39.111,-24.765 ; 38.931,-24.199 ccw(c39.443,-23.688) R24_drivermotor3.1@39.443,-24.411 ; 38.961,-24.229 ccw(c39.446,-23.744) R24_drivermotor3.1@39.446,-24.43
  other v1: 39.446,-24.765
HALL1_drivermotor4: R24_drivermotor4.1 R27_drivermotor4.2 U9.31 | length 43.4
  Top Layer w0.203: U9.31@9.433,-2.564 19.229,-2.564 19.558,-2.235
  Top Layer w0.381: 19.558,-2.235 35.077,13.284 36.297,13.284
  Top Layer w0.6: 36.271,13.259 R24_drivermotor4.1@43.482,13.259 ; 42.242,13.259 ccw(c42.242,14.583) R24_drivermotor4.1@43.179,13.647 ; 42.579,13.259 ccw(c42.579,14.241) R24_drivermotor4.1@43.273,13.546 ; R24_drivermotor4.1@42.824,13.259 cw(c42.824,12.623) R24_drivermotor4.1@43.273,13.073 ; R24_drivermotor4.1@43.256,13.233 R24_drivermotor4.1@43.561,12.929
  other v1: 43.51,13.31
HALL2_drivermotor1: R25_drivermotor1.1 R28_drivermotor1.2 U9.83 | length 41.4
  Top Layer w0.203: -28.931,-5.062 U9.83@-11.619,-5.062
  Top Layer w0.381: R25_drivermotor1.1@-43.811,7.811 ccw(c-43.029,8.089) R25_drivermotor1.1@-43.244,7.288 ; R25_drivermotor1.1@-43.567,7.375 cw(c-43.567,5.725) -42.401,6.891 ; R25_drivermotor1.1@-43.512,7.473 cw(c-43.512,6.194) -42.607,7.098 ; v1(-43.512,7.917) R25_drivermotor1.1@-43.342,7.747 ; R25_drivermotor1.1@-43.307,7.569 -43.078,7.569 -30.48,-5.029 -28.931,-5.029 ; R25_drivermotor1.1@-43.108,7.834 ccw(c-42.539,7.834) -42.941,7.432 ; R25_drivermotor1.1@-43.067,7.917 ccw(c-42.2,7.917) -42.813,7.304
HALL2_drivermotor2: R25_drivermotor2.1 R28_drivermotor2.2 U9.112 | length 36.4
  Top Layer w0.203: -30.328,-18.364 -29.954,-17.99 -8.823,-17.99 -8.342,-18.472 U9.112@-8.342,-19.339 ; -8.455,-18.359 cw(c-8.671,-18.575) U9.112@-8.366,-18.575
  Top Layer w0.6: R25_drivermotor2.1@-37.395,-25.402 cw(c-36.69,-25.534) R25_drivermotor2.1@-36.876,-24.841 ; R25_drivermotor2.1@-37.207,-24.93 ccw(c-37.207,-24.173) -36.672,-24.708 ; R25_drivermotor2.1@-37.122,-25.159 -30.328,-18.364 ; R25_drivermotor2.1@-36.857,-25.28 cw(c-35.924,-25.28) -36.584,-24.62 ; R25_drivermotor2.1@-36.8,-25.451 cw(c-35.317,-25.451) -36.365,-24.402
  other v1: -37.135,-25.451
HALL2_drivermotor3: R25_drivermotor3.1 R28_drivermotor3.2 U9.11 | length 38.5
  Top Layer w0.203: U9.11@9.433,-12.564 29.21,-12.564
  Top Layer w0.6: 29.21,-12.564 30.268,-12.564 R25_drivermotor3.1@40.932,-23.228 ; 40.322,-22.619 ccw(c41.017,-21.924) R25_drivermotor3.1@41.017,-22.906 ; 40.37,-22.666 cw(c39.668,-23.368) R25_drivermotor3.1@40.661,-23.368 ; 40.46,-22.756 cw(c39.959,-23.256) R25_drivermotor3.1@40.667,-23.256 ; R25_drivermotor3.1@40.554,-22.85 ccw(c40.996,-22.408) R25_drivermotor3.1@40.996,-23.033
  other v1: 40.996,-23.368
HALL2_drivermotor4: R25_drivermotor4.1 R28_drivermotor4.2 U9.32 | length 42
  Top Layer w0.203: U9.32@9.433,-2.064 18.815,-2.064 19.063,-1.816
  Top Layer w0.381: 19.063,-1.816 35.306,14.427
  Top Layer w0.6: 35.306,14.427 35.814,14.935 R25_drivermotor4.1@42.113,14.935 ; 41.188,14.935 ccw(c41.188,16.212) R25_drivermotor4.1@42.091,15.309 ; 41.548,14.935 ccw(c41.548,15.831) R25_drivermotor4.1@42.181,15.197 ; R25_drivermotor4.1@41.671,14.935 cw(c41.671,14.213) R25_drivermotor4.1@42.181,14.724
  other v1: 42.418,14.961
HALL3_drivermotor1: R23_drivermotor1.1 R26_drivermotor1.2 U9.80 | length 41.2
  Top Layer w0.203: -25.603,-3.564 U9.80@-11.617,-3.564
  Top Layer w0.381: R23_drivermotor1.1@-41.844,11.041 ccw(c-41.159,11.154) R23_drivermotor1.1@-41.339,10.483 ; R23_drivermotor1.1@-41.586,10.55 cw(c-41.586,9.574) -40.896,10.264 ; R23_drivermotor1.1@-41.549,11.032 cw(c-41.799,10.213) -40.973,10.435 ; R23_drivermotor1.1@-41.531,10.648 cw(c-41.531,10.043) -41.103,10.471 ; v1(-41.531,11.092) -41.531,10.898 -27.069,-3.564 -25.603,-3.564 ; R23_drivermotor1.1@-41.127,11.009 ccw(c-39.883,11.009) -40.762,10.13 ; R23_drivermotor1.1@-41.086,11.092 ccw(c-39.544,11.092) -40.635,10.002
HALL3_drivermotor2: R23_drivermotor2.1 R26_drivermotor2.2 U9.107 | length 33
  Top Layer w0.203: -35.23,-17.755 -34.539,-17.064 U9.107@-11.617,-17.064
  Top Layer w0.6: R23_drivermotor2.1@-39.98,-22.169 ccw(c-39.98,-21.361) -39.408,-21.933 ; R23_drivermotor2.1@-39.946,-22.156 ccw(c-39.946,-21.396) -39.408,-21.933 ; R23_drivermotor2.1@-39.802,-22.327 -35.23,-17.755 ; R23_drivermotor2.1@-39.645,-22.504 cw(c-38.836,-22.504) -39.408,-21.933 ; R23_drivermotor2.1@-39.596,-22.506 cw(c-38.665,-22.506) -39.323,-21.848
  other v1: -39.98,-22.504
HALL3_drivermotor3: R23_drivermotor3.1 R26_drivermotor3.2 U9.8 | length 35.8
  Top Layer w0.203: U9.8@9.433,-14.064 25.222,-14.064
  Top Layer w0.6: 25.222,-14.064 25.875,-14.064 R23_drivermotor3.1@37.96,-26.149 ; 37.275,-25.464 cw(c36.4,-26.34) R23_drivermotor3.1@37.638,-26.34 ; 37.395,-25.584 cw(c36.712,-26.267) R23_drivermotor3.1@37.678,-26.267 ; 37.517,-25.706 ccw(c38.028,-25.194) R23_drivermotor3.1@38.028,-25.917
  other v1: 37.973,-26.34
HALL3_drivermotor4: R23_drivermotor4.1 R26_drivermotor4.2 U9.30 | length 43.4
  Top Layer w0.203: U9.30@9.433,-3.064 19.669,-3.064 19.99,-2.743
  Top Layer w0.381: 19.99,-2.743 34.163,11.43 34.9,11.43
  Top Layer w0.6: 34.9,11.43 R23_drivermotor4.1@44.579,11.43 ; 43.189,11.43 ccw(c43.189,12.968) R23_drivermotor4.1@44.276,11.88 ; 43.462,11.43 ccw(c43.462,12.672) R23_drivermotor4.1@44.34,11.794 ; R23_drivermotor4.1@44.399,11.405 R23_drivermotor4.1@44.399,11.506
  other v1: 44.577,11.557
ID0: R18.2 S1.1 U1.5 | length 18.1
  Top Layer w0.305: U1.5@6.075,13.05 7.868,13.05 7.925,13.106 ; U1.5@6.762,12.963 cw(c6.971,12.754) 6.971,13.05 cw(c6.971,13.346) U1.5@6.762,13.136
  Top Layer w0.508: 7.925,13.106 13.686,13.106 S1.1@14.791,14.212 15.027,14.447 v1(15.027,16.129) ; S1.1@14.283,14.212 cw(c13.057,14.212) 13.924,13.345 cw(c14.791,12.477) S1.1@14.791,13.704 ; S1.1@14.432,14.571 ccw(c12.997,16.006) v1@15.027,16.006 ; v1@14.697,15.939 cw(c13.806,15.424) 14.799,15.158 ; v1@14.757,15.86 cw(c14.107,15.209) 15.027,15.209 cw(c15.946,15.209) v1@15.296,15.86 ; 14.839,15.306 cw(c15.623,15.097) v1@15.217,15.799
ID1: R19.2 S1.4 U1.11 | length 24.1
  Top Layer w0.305: U1.11@6.075,17.85 18.281,17.85 v1@19.599,19.167 ; U1.11@6.762,17.763 cw(c6.971,17.554) 6.971,17.85 cw(c6.971,18.146) U1.11@6.762,17.936 ; 18.721,18.289 ccw(c17.68,19.329) v1@19.152,19.329 ; 19.027,18.595 cw(c19.634,17.988) v1@19.634,18.847 ; 19.241,18.809 ccw(c18.721,19.329) v1@19.456,19.329
  Top Layer w0.508: v1@19.365,19.599 ccw(c18.8,20.163) 19.599,20.163 ; v1@19.599,19.167 19.599,21.559 S1.4@19.871,21.832 ; v1@19.599,19.947 cw(c21.756,19.947) S1.4@20.231,21.473 ; 19.599,20.335 ccw(c20.64,20.335) v1@19.904,19.599 ; 19.801,20.701 ccw(c21.281,20.304) v1@19.962,19.523
  other v1: 19.634,19.329
ID2: R20.2 S1.3 U1.10 | length 21.3
  Top Layer w0.305: U1.10@6.075,17.05 8.436,17.05 8.63,17.243 18.738,17.243 19.599,16.383 v1@19.599,16.205 ; U1.10@6.762,16.963 cw(c6.971,16.754) 6.971,17.05 cw(c6.971,17.346) U1.10@6.762,17.136 ; 18.738,17.243 ccw(c19.409,17.914) v1@19.592,16.984 ; 19.012,16.97 cw(c18.552,16.51) v1@19.202,16.51
  Top Layer w0.508: v1@19.416,16.241 cw(c18.315,15.14) 19.871,15.14 ; S1.3@19.512,14.571 ccw(c18.645,15.438) 19.871,15.438 ccw(c21.098,15.438) S1.3@20.231,14.571 ; v1@19.599,16.205 19.871,15.932 S1.3@19.871,14.212
  other v1: 19.685,16.51
ID3: R21.2 S1.6 U1.12 | length 18.1
  Top Layer w0.305: U1.12@6.075,18.65 14.118,18.65 v1(15.001,19.533) ; U1.12@6.762,18.563 cw(c6.971,18.354) 6.971,18.65 cw(c6.971,18.946) U1.12@6.762,18.736 ; v1@14.519,19.533 cw(c13.353,19.533) 14.177,18.709 cw(c15.001,17.885) v1@15.001,19.05
  Top Layer w0.508: S1.6@14.432,21.473 cw(c13.058,20.099) v1@15.001,20.099 ; v1@14.671,19.723 ccw(c13.441,20.433) 14.813,20.801 ; v1@14.732,19.802 ccw(c14.081,20.452) 15.001,20.452 ccw(c15.921,20.452) v1@15.271,19.802 ; S1.6@14.791,21.832 15.001,21.622 v1(15.001,19.533)
INIT: R53.1 U9.58 U11.8 | length 59.3
  Top Layer w0.203: v10@-4.242,4.07 cw(c-4.242,3.332) -3.72,3.854 ; v10@-4.239,4.372 -2.842,2.975 U9.58@-2.842,1.711 ; v10@-3.993,4.318 ccw(c-3.531,4.318) -3.858,3.991
  Top Layer w0.4: v2@-19.328,-28.88 ccw(c-18.527,-28.88) -19.093,-29.446 ; v2(-19.228,-28.88) -19.228,-29.312 -17.628,-30.911 U11.8@-16.363,-30.911 ; v2@-18.928,-28.88 ccw(c-17.161,-28.88) -18.41,-30.129
  Bottom Layer w0.508: R53.1@-19.701,-19.481 cw(c-21.027,-20.807) -19.152,-20.807 ; R53.1@-19.701,-18.721 ccw(c-21.027,-17.395) -19.152,-17.395 ; v2@-19.402,-28.706 ccw(c-20.006,-28.102) -19.152,-28.102 ; v2@-19.152,-28.88 -19.152,-1.448 -13.233,4.47 -4.394,4.47 v10@-4.166,4.242 ; -4.841,4.47 cw(c-4.841,3.718) v10@-4.31,4.25
  other v10: -4.242,4.318
IO113: SPIN_BACK1.2 U9.113 | length 12.6
  Top Layer w0.203: -7.874,-20.98 -7.842,-20.949 U9.113@-7.842,-19.339
  Top Layer w0.305: -7.842,-20.98 -7.842,-26.88 -6.502,-28.219 SPIN_BACK1.2@-6.401,-28.219 ; -7.695,-27.027 cw(c-8.928,-28.261) SPIN_BACK1.2@-7.184,-28.261 ; -7.393,-27.329 ccw(c-6.586,-26.522) SPIN_BACK1.2@-6.586,-27.663 ; -7.174,-27.548 cw(c-7.887,-28.261) SPIN_BACK1.2@-6.879,-28.261
IO116: SPIN_BACK1.1 U9.116 | length 9.9
  Top Layer w0.203: -6.35,-20.98 -6.342,-20.973 U9.116@-6.342,-19.339
  Top Layer w0.305: SPIN_BACK1.1@-7.009,-25.299 ccw(c-8.623,-23.691) -6.345,-23.687 ; SPIN_BACK1.1@-6.793,-25.514 ccw(c-7.886,-24.426) -6.344,-24.423 ; -6.35,-20.98 SPIN_BACK1.1@-6.341,-25.781 ; -6.343,-24.868 ccw(c-5.735,-24.867) SPIN_BACK1.1@-6.164,-25.297
IO118: SPIN_BACK1.4 U9.118 | length 12.5
  Top Layer w0.203: -5.359,-20.879 -5.342,-20.862 U9.118@-5.342,-19.339 ; SPIN_BACK1.4@-3.454,-28.261 SPIN_BACK1.4@-3.454,-28.042
  Top Layer w0.305: -5.342,-20.879 -5.342,-23.563 -5.334,-23.571 -5.334,-26.975 -4.048,-28.261 SPIN_BACK1.4@-3.454,-28.261 ; -5.07,-27.239 ccw(c-4.046,-26.216) SPIN_BACK1.4@-4.046,-27.663 ; -5.065,-27.244 cw(c-6.081,-28.261) SPIN_BACK1.4@-4.644,-28.261
IO119: SPIN_BACK1.3 U9.119 | length 9.8
  Top Layer w0.203: U9.119@-4.842,-19.339 -4.842,-22.158 -4.47,-22.53
  Top Layer w0.305: -4.47,-22.53 -3.962,-23.038 SPIN_BACK1.3@-3.962,-25.629 ; SPIN_BACK1.3@-4.469,-25.298 ccw(c-5.691,-24.076) -3.962,-24.076 ; SPIN_BACK1.3@-4.253,-25.514 ccw(c-4.955,-24.812) -3.962,-24.812 ; -3.962,-24.48 ccw(c-2.805,-24.48) SPIN_BACK1.3@-3.623,-25.298 ; SPIN_BACK1.3@-3.607,-25.578 SPIN_BACK1.3@-3.505,-25.679